# Altium PCB v1_long.PcbDoc (part 3 of 4)
Units mm, origin at the board's own origin, x right, y up, seen from the top; angles counter-clockwise.
Board outline 116.27 x 185.5 mm, 2 copper layers (Top Layer, Bottom Layer); 294 components, 195 nets, 982 pads, 413 vias.
Unrouted connection lines stored in the file: 3.
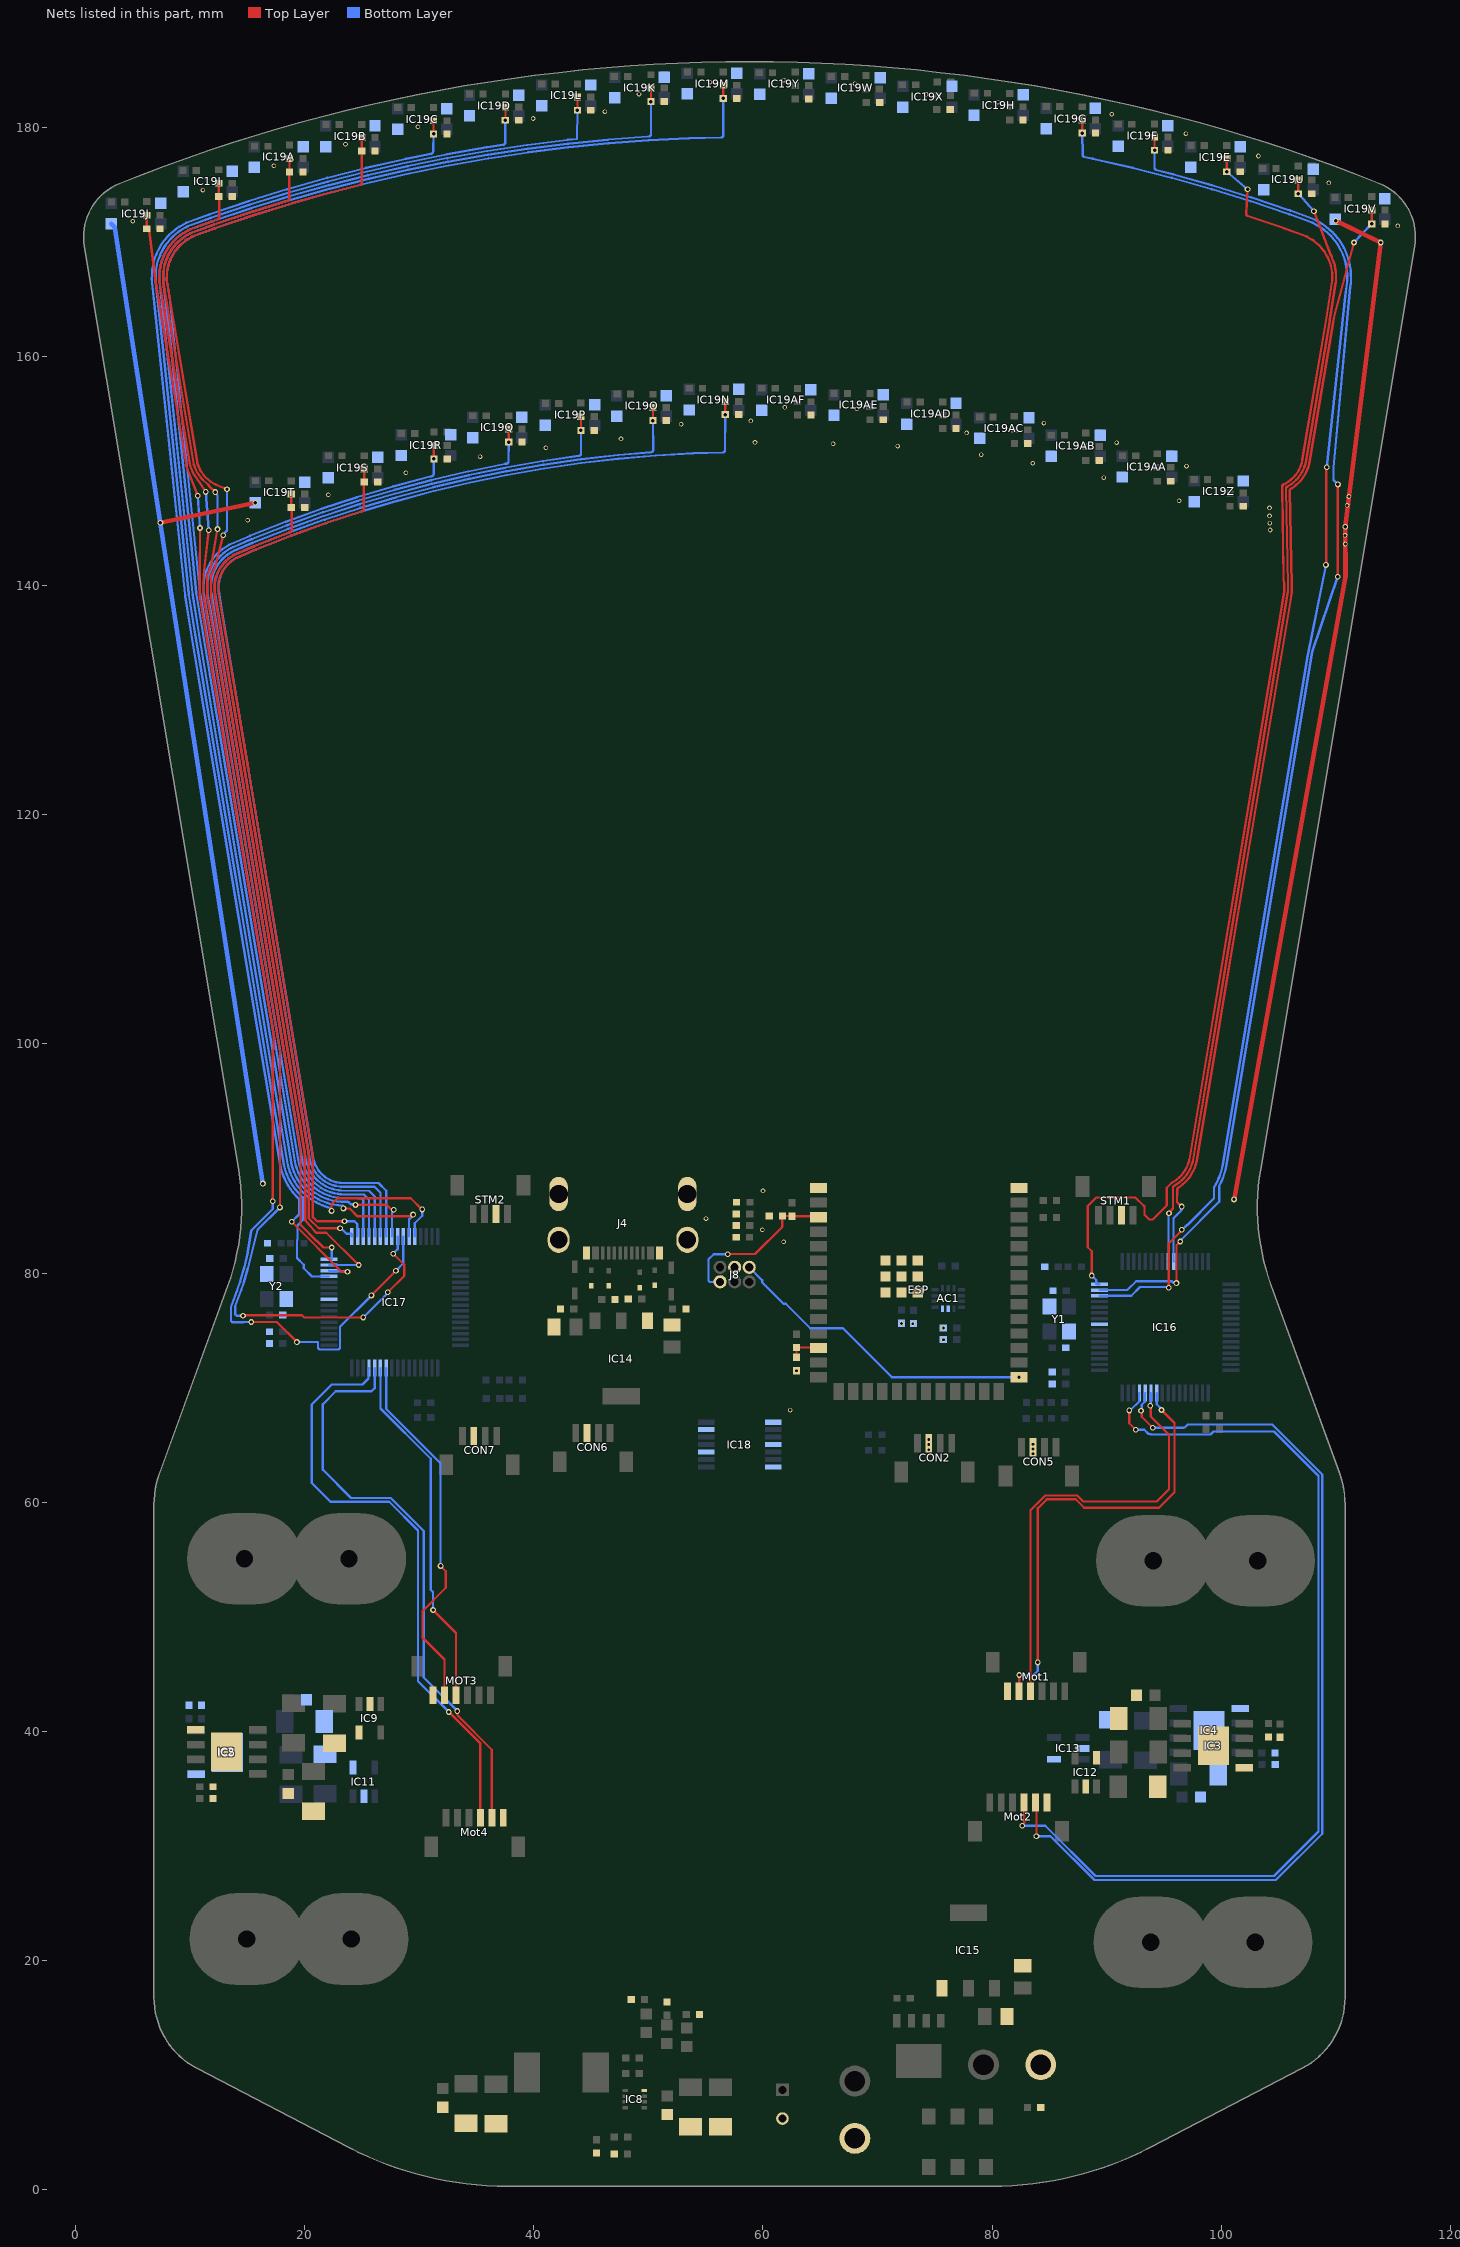
[diagram p3: the nets of this part, all layers, seen from the top]

## Via types
v1: diameter 0.5, hole 0.3, Top Layer to Bottom Layer, tented both sides, 349 vias
v2: diameter 0.4, hole 0.25, Top Layer to Bottom Layer, tented both sides, 63 vias
v3: diameter 0.7, hole 0.4, Top Layer to Bottom Layer, tented both sides, 1 vias

## Nets (pads, with @x,y where several pads share a name; then routed paths per layer and width w, separated by ;. In a path a pad name is that pad's centre, name@x,y a point inside that pad or via, vN(x,y) a via of type N, cw(c..) or ccw(c..) an arc to the next point about the centre after c; other vN are vias at no path point) (continued)
ADC1-11: C53G.1 IC16.14 R42G.1 | length 127.4
  Top Layer w0.2: v1(87.866,179.525) R42G.1@87.866,180.675 ; v1(95.437,78.709) 95.437,82.605 96.553,83.721 v1(96.553,83.772) ; v1(109.15,141.825) 109.188,141.863 109.188,150.312 v1(109.225,150.35)
  Bottom Layer w0.2: v1(87.866,179.525) 87.914,177.623 ccw(c88.114,177.628) 88.073,177.432 88.788,177.287 cw(c88.35,175.123) 88.844,177.275 92.253,176.495 cw(c91.762,174.342) 92.309,176.481 95.697,175.616 cw(c95.153,173.476) 95.754,175.601 99.121,174.651 cw(c98.521,172.526) 99.174,174.635 102.517,173.601 cw(c101.865,171.492) 102.571,173.584 105.886,172.467 cw(c105.181,170.375) 105.938,172.449 107.827,171.759 cw(c107.07,169.685) 108.174,171.597 108.623,171.338 cw(c107.521,169.425) 108.938,171.119 109.337,170.784 cw(c107.921,169.091) 109.608,170.515 109.944,170.117 cw(c108.257,168.692) 110.165,169.804 110.425,169.357 cw(c108.519,168.242) 110.591,169.007 110.771,168.52 cw(c108.7,167.754) 110.872,168.15 110.966,167.641 cw(c108.794,167.241) 111.002,167.259 111.006,166.739 cw(c108.798,166.72) 110.99,166.451 110.848,165.288 v1(109.225,150.35) ; IC16.14@89.387,78.012 92.149,78.012 92.923,78.786 95.279,78.786 95.356,78.709 v1(95.437,78.709) ; v1(96.553,83.772) 96.597,83.772 97.015,84.19 97.054,84.19 99.385,86.521 99.385,87.473 99.539,87.744 ccw(c95.913,89.803) 99.843,88.409 99.948,88.706 ccw(c96.018,90.1) 100.131,89.414 103.376,108.866 107.554,133.916 v1(109.15,141.825)
ADC1-12: C53F.1 IC16.15 R42F.1 | length 121.5
  Top Layer w0.2: v1(94.191,178.025) R42F.1@94.191,179.175 ; v1(96.1,79.125) 96.1,82.425 v1(96.425,82.75) ; v1(110.175,140.8) 110.187,140.812 110.187,148.837 v1(110.2,148.85)
  Bottom Layer w0.2: IC16.15@89.387,78.512 91.812,78.512 92.589,79.289 95.678,79.289 95.784,79.182 96.043,79.182 v1(96.1,79.125) ; v1(94.191,178.025) 94.176,176.505 ccw(c94.376,176.503) 94.326,176.309 95.789,175.93 cw(c95.153,173.476) 95.841,175.916 99.209,174.966 cw(c98.521,172.526) 99.271,174.947 102.612,173.914 cw(c101.865,171.492) 102.674,173.894 105.991,172.777 cw(c105.181,170.375) 106.052,172.755 107.939,172.067 cw(c107.07,169.685) 108.337,171.881 108.786,171.622 cw(c107.521,169.425) 109.147,171.37 109.547,171.035 cw(c107.921,169.091) 109.859,170.725 110.194,170.328 cw(c108.257,168.692) 110.447,169.969 110.709,169.519 cw(c108.519,168.242) 110.897,169.122 111.078,168.634 cw(c108.7,167.754) 111.194,168.208 111.287,167.702 cw(c108.794,167.241) 111.329,167.261 111.333,166.742 cw(c108.798,166.72) 111.315,166.412 111.229,165.709 109.803,150.297 109.803,149.247 v1(110.2,148.85) ; v1(96.425,82.75) 96.425,82.823 99.823,86.221 99.823,87.582 ccw(c95.913,89.803) 100.151,88.3 100.256,88.596 ccw(c96.018,90.1) 100.454,89.361 103.714,108.902 107.96,134.272 v1(110.175,140.8)
ADC1-13: C53E.1 IC16.16 R42E.1 | length 115.6
  Top Layer w0.2: v1(88.7,79.775) 88.7,81.9 88.35,82.25 88.35,85.85 89.1,86.6 92.504,86.6 93.241,85.863 93.3,85.804 93.3,85.105 93.359,85.046 93.73,84.675 94.02,84.675 95.25,85.905 95.25,87.445 95.68,87.875 95.933,88.022 ccw(c95.315,89.083) 96.108,88.146 96.349,88.35 ccw(c95.556,89.286) 96.5,88.503 96.702,88.746 ccw(c95.757,89.529) 96.824,88.923 96.98,89.197 ccw(c95.913,89.803) 97.069,89.393 97.175,89.69 ccw(c96.018,90.1) 97.228,89.898 99.288,102.219 105.285,138.169 105.501,139.492 ccw(c104.29,139.689) 105.517,139.692 105.516,140.024 ccw(c104.289,140.022) 105.499,140.227 105.444,140.554 105.332,148.669 cw(c105.532,148.671) 105.438,148.848 ccw(c105.016,149.642) 105.456,148.857 105.848,149.078 ccw(c105.407,149.862) 106.011,149.195 106.344,149.497 ccw(c105.74,150.163) 106.476,149.646 106.734,150.013 ccw(c105.997,150.53) 106.83,150.189 107,150.603 ccw(c106.167,150.945) 107.055,150.797 107.092,151.019 109.15,163.15 109.686,166.572 ccw(c108.798,166.72) 109.698,166.727 109.694,167.248 ccw(c108.794,167.241) 109.68,167.403 109.586,167.916 ccw(c108.7,167.754) 109.544,168.066 109.363,168.555 ccw(c108.519,168.242) 109.297,168.695 109.035,169.146 ccw(c108.257,168.692) 108.945,169.273 108.609,169.671 ccw(c107.921,169.091) 108.498,169.781 108.099,170.115 ccw(c107.521,169.425) 107.971,170.205 107.519,170.465 ccw(c107.07,169.685) 107.378,170.531 105.49,171.22 ccw(c105.181,170.375) 105.469,171.227 102.323,172.287 cw(c102.387,172.477) 102.187,172.488 v1(102.309,174.615) ; v1(100.491,176.15) R42E.1@100.491,177.3
  Bottom Layer w0.2: v1(88.7,79.775) 89.089,79.386 89.089,79.062 89.139,79.012 IC16.16@89.387,79.012 ; v1(100.491,176.15) v1(102.309,174.615)
ADC1-14: C53U.1 IC16.25 R42U.1 | length 97.7
  Top Layer w0.2: v1(95.45,85.214) 95.45,85.292 95.8,85.642 95.8,87.533 95.86,87.592 cw(c96.001,87.451) 95.903,87.625 96.125,87.75 96.228,87.824 ccw(c95.315,89.083) 96.319,87.896 96.561,88.101 ccw(c95.556,89.286) 96.752,88.294 96.954,88.537 ccw(c95.757,89.529) 97.108,88.761 97.263,89.034 ccw(c95.913,89.803) 97.377,89.283 97.483,89.58 ccw(c96.018,90.1) 97.551,89.844 99.611,102.165 101.281,112.178 105.608,138.115 ; 105.608,138.117 105.653,138.391 105.823,139.439 ccw(c104.29,139.689) 105.844,139.691 105.843,140.022 ccw(c104.289,140.022) 105.843,140.058 105.662,148.477 cw(c105.862,148.481) 105.764,148.655 106.008,148.793 ccw(c105.407,149.862) 106.23,148.952 106.564,149.254 ; 106.564,149.254 ccw(c105.74,150.163) 106.744,149.458 107.002,149.825 ccw(c105.997,150.53) 107.133,150.065 ; v1(106.741,174.225) R42U.1@106.741,175.425 ; 107.133,150.065 107.303,150.481 ccw(c106.167,150.945) 107.377,150.74 109.472,163.095 ccw(c109.15,163.15) 109.473,163.099 109.491,163.211 110.01,166.529 ccw(c108.798,166.72) 110.025,166.731 110.021,167.25 ccw(c108.794,167.241) 110.001,167.463 109.911,167.953 cw(c110.108,167.99) 109.908,167.99 109.908,168.041 ccw(c109.708,168.041) 109.878,168.147 109.852,168.188 cw(c110.022,168.293) 109.835,168.223 109.683,168.632 cw(c109.871,168.701) 109.671,168.701 109.671,168.759 109.615,168.814 cw(c109.757,168.956) 109.57,168.884 v1(108.1,172.7)
  Bottom Layer w0.2: IC16.25@95.375,81 95.412,81.037 95.412,85.177 v1(95.45,85.214) ; v1(106.741,174.225) v1(108.1,172.7)
ADC1-15: C53V.1 IC16.26 R42V.1 | length 95.2
  Top Layer w0.2: v1(96.55,85.8) 96.547,85.8 96.152,86.195 ccw(c95.825,86.197) 96.152,86.197 96.156,87.277 cw(c96.356,87.275) 96.258,87.45 96.285,87.465 ccw(c96.125,87.75) 96.317,87.485 96.42,87.56 ccw(c95.315,89.083) 96.531,87.647 96.649,87.747 96.772,87.851 ccw(c95.556,89.286) 97.004,88.086 97.204,88.327 ccw(c95.757,89.529) 97.393,88.6 97.547,88.872 ccw(c95.913,89.803) 97.685,89.174 97.791,89.471 ccw(c96.018,90.1) 97.874,89.79 99.933,102.111 101.611,112.165 106.05,138.65 106.155,139.443 ccw(c104.29,139.689) 106.171,139.692 106.17,140.025 ccw(c104.289,140.022) 106.17,140.064 105.993,148.288 cw(c106.193,148.292) 106.095,148.466 106.169,148.508 ccw(c105.407,149.862) 106.45,148.71 106.782,149.011 ccw(c105.74,150.163) 107.011,149.27 107.269,149.638 ccw(c105.997,150.53) 107.435,149.941 107.605,150.357 ccw(c106.167,150.945) 107.699,150.686 109.795,163.041 ccw(c109.15,163.15) 109.796,163.049 109.859,163.452 v1(111.6,169.975) ; v1(113.141,171.6) R42V.1@113.141,172.8
  Bottom Layer w0.2: IC16.26@95.875,81 95.845,81.03 95.845,84.789 96.514,85.458 96.514,85.764 v1(96.55,85.8) ; v1(111.6,169.975) v1(113.141,171.6)
ADC2-0: C53T.1 IC17.17 R42T.1 | length 72.4
  Top Layer w0.2: R42T.1@18.816,148 C53T.1@18.816,146.85 18.85,146.65 18.85,144.88 cw(c18.65,144.88) 18.718,144.692 18.674,144.676 ccw(c19.09,143.522) 18.64,144.664 15.618,143.472 ccw(c16.067,142.331) 15.584,143.459 13.938,142.754 ccw(c14.421,141.626) 13.758,142.659 13.476,142.478 ccw(c14.14,141.446) 13.315,142.354 13.062,142.125 13.056,142.119 ccw(c13.893,141.222) 12.951,142.008 12.94,141.995 12.929,141.981 12.652,141.63 12.409,141.182 12.133,140.53 12.133,139.18 12.136,139.164 14.751,123.897 16.023,116.27 18.831,99.434 20.346,90.351 cw(c20.149,90.318) 20.348,90.338 20.348,90.336 20.35,90.309 20.35,84.763 21.213,83.9 v1(23.075,83.9)
  Bottom Layer w0.2: v1(23.075,83.9) 23.156,83.9 23.631,83.425 24.05,83.425 24.1,83.375 IC17.17@24.1,83.188
ADC2-1: C53S.1 IC17.18 R42S.1 | length 79.5
  Top Layer w0.2: v1(23.459,84.521) 21.054,84.521 20.7,84.875 20.7,90.2 20.677,90.352 ccw(c20.48,90.322) 20.677,90.355 15.073,123.951 15.056,124.055 12.463,139.299 12.46,139.316 12.46,140.395 12.684,140.986 cw(c13.526,140.667) 12.736,141.099 12.897,141.391 cw(c13.686,140.959) 12.979,141.516 13.185,141.777 cw(c13.893,141.222) 13.288,141.888 13.534,142.111 cw(c14.14,141.446) 13.654,142.204 13.933,142.383 cw(c14.421,141.626) 14.068,142.454 15.713,143.158 cw(c16.067,142.331) 15.737,143.168 18.76,144.359 cw(c19.09,143.522) 18.784,144.368 21.84,145.472 cw(c22.146,144.625) 21.865,145.48 24.951,146.495 cw(c25.232,145.64) 24.976,146.503 25.008,146.512 ccw(c24.951,146.704) 25.151,146.704 25.151,148.85 C53S.1@25.191,149.05 R42S.1@25.191,150.2
  Bottom Layer w0.2: v1(23.459,84.521) 24.329,84.521 24.575,84.275 24.575,83.213 IC17.18@24.6,83.188
ADC2-2: C53R.1 IC17.19 R42R.1 | length 87.3
  Top Layer w0.2: v1(31.266,151.075) R42R.1@31.266,152.25
  Bottom Layer w0.2: 19.551,89.361 19.656,89.067 ccw(c21.737,89.803) 19.818,88.712 19.974,88.437 ccw(c21.893,89.529) 20.192,88.121 20.396,87.875 ccw(c22.094,89.286) 20.666,87.603 20.908,87.397 ccw(c22.335,89.083) 21.224,87.174 21.497,87.015 ccw(c22.607,88.924) 21.846,86.851 22.143,86.743 ccw(c22.903,88.815) 22.515,86.642 22.827,86.587 ccw(c23.214,88.76) 22.942,86.569 ccw(c23.214,88.76) 23.169,86.553 24.65,86.523 24.67,86.504 24.95,86.504 25.1,86.354 IC17.19@25.1,83.188 ; 19.551,89.361 cw(c21.632,90.1) 19.454,89.735 16.595,106.878 11.453,137.701 11.23,139.042 11.182,139.329 cw(c13.36,139.689) 11.152,139.691 11.153,140.027 cw(c13.361,140.022) 11.184,140.39 11.24,140.722 cw(c13.417,140.351) 11.331,141.075 11.392,141.253 11.44,141.391 cw(c13.526,140.667) 11.589,141.726 11.749,142.018 cw(c13.686,140.959) 11.952,142.326 12.158,142.588 cw(c13.893,141.222) 12.408,142.856 12.655,143.08 cw(c14.14,141.446) 12.948,143.305 13.226,143.483 cw(c14.421,141.626) 13.552,143.656 15.199,144.361 cw(c16.067,142.331) 15.258,144.385 18.278,145.575 cw(c19.09,143.522) 18.34,145.599 21.393,146.701 cw(c22.146,144.625) 21.456,146.723 24.54,147.737 cw(c25.232,145.64) 24.603,147.757 27.717,148.682 cw(c28.346,146.565) 27.779,148.699 30.919,149.534 cw(c31.486,147.4) 30.98,149.549 31.09,149.575 ccw(c31.044,149.77) 31.244,149.766 v1(31.266,151.075)
ADC2-3: C53Q.1 IC17.20 R42Q.1 | length 94
  Top Layer w0.2: R42Q.1@37.791,153.7 37.8,153.691 v1(37.8,152.55)
  Bottom Layer w0.2: 21.504,146.394 18.453,145.292 ccw(c19.09,143.522) 18.397,145.271 15.379,144.081 ccw(c16.067,142.331) 15.325,144.059 13.681,143.356 ccw(c14.421,141.626) 13.402,143.208 13.125,143.03 ccw(c14.14,141.446) 12.875,142.838 12.628,142.614 ccw(c13.893,141.222) 12.415,142.386 12.209,142.124 ccw(c13.686,140.959) 12.035,141.861 11.877,141.571 ccw(c13.526,140.667) 11.749,141.283 11.64,140.968 ccw(c13.417,140.351) 11.562,140.667 11.506,140.336 ccw(c13.361,140.022) 11.48,140.026 11.479,139.692 11.479,139.689 ccw(c13.36,139.689) 11.505,139.382 11.552,139.096 11.776,137.755 19.777,89.789 ccw(c21.632,90.1) 19.859,89.471 19.964,89.176 19.965,89.173 ccw(c21.737,89.803) 20.102,88.873 20.258,88.598 ccw(c21.893,89.529) 20.444,88.33 20.647,88.085 ccw(c22.094,89.286) 20.877,87.852 21.12,87.646 ccw(c22.335,89.083) 21.389,87.457 21.662,87.298 ccw(c22.607,88.924) 21.958,87.158 22.255,87.05 ccw(c22.903,88.815) 22.572,86.964 22.884,86.908 ; 21.504,146.394 cw(c22.146,144.625) 21.558,146.412 21.56,146.413 24.642,147.426 ; 22.885,86.908 ccw(c23.214,88.76) 23.176,86.88 25.174,86.84 25.6,86.414 IC17.20@25.6,83.188 ; 24.642,147.426 cw(c25.232,145.64) 24.698,147.444 27.809,148.368 cw(c28.346,146.565) 27.863,148.383 31.001,149.217 cw(c31.486,147.4) 31.057,149.231 34.216,149.975 cw(c34.648,148.144) 34.271,149.987 37.45,150.638 cw(c37.831,148.796) 37.509,150.649 37.619,150.668 ccw(c37.585,150.866) 37.785,150.863 v1(37.8,152.55)
ADC2-4: C53P.1 IC17.21 R42P.1 | length 100.5
  Top Layer w0.2: R42P.1@44.091,154.775 44.107,154.759 v1(44.107,153.575)
  Bottom Layer w0.2: 22.366,87.357 22.072,87.465 cw(c22.607,88.924) 21.826,87.58 21.552,87.74 cw(c22.335,89.083) 21.331,87.896 21.091,88.1 cw(c22.094,89.286) 20.899,88.293 20.696,88.537 cw(c21.893,89.529) 20.542,88.762 20.386,89.035 cw(c21.737,89.803) 20.272,89.286 20.167,89.581 cw(c21.632,90.1) 20.099,89.843 12.099,137.809 11.912,138.927 11.827,139.435 cw(c13.36,139.689) 11.806,139.689 11.806,139.692 11.807,140.025 cw(c13.361,140.022) 11.829,140.282 11.885,140.612 cw(c13.417,140.351) 11.948,140.861 12.058,141.176 cw(c13.526,140.667) 12.162,141.412 12.322,141.704 cw(c13.686,140.959) 12.465,141.921 12.672,142.183 cw(c13.893,141.222) 12.848,142.372 13.095,142.596 cw(c14.14,141.446) 13.3,142.754 13.58,142.933 cw(c14.421,141.626) 13.81,143.056 15.454,143.759 cw(c16.067,142.331) 15.498,143.777 18.517,144.967 cw(c19.09,143.522) 18.563,144.984 21.618,146.087 cw(c22.146,144.625) 21.66,146.102 24.744,147.116 cw(c25.232,145.64) 24.79,147.13 27.903,148.054 cw(c28.346,146.565) 27.947,148.067 31.085,148.901 cw(c31.486,147.4) 31.132,148.913 34.29,149.656 cw(c34.648,148.144) 34.336,149.666 37.517,150.318 cw(c37.831,148.796) 37.564,150.327 40.763,150.887 cw(c41.031,149.356) 40.811,150.894 43.946,151.35 ccw(c43.918,151.548) 44.118,151.549 v1(44.107,153.575) ; 22.367,87.357 ccw(c22.903,88.815) 22.631,87.285 22.941,87.23 ccw(c23.214,88.76) 23.183,87.207 25.625,87.158 26.1,86.683 IC17.21@26.1,83.188
ADC2-5: C53O.1 IC17.22 R42O.1 | length 107.1
  Top Layer w0.2: v1(50.391,154.425) R42O.1@50.391,155.575
  Bottom Layer w0.2: IC17.22@26.6,83.188 26.6,87.008 26.075,87.533 23.214,87.533 cw(c23.214,88.76) 22.999,87.552 22.69,87.607 cw(c22.903,88.815) 22.48,87.664 22.185,87.772 cw(c22.607,88.924) 21.99,87.863 21.718,88.022 cw(c22.335,89.083) 21.543,88.146 21.302,88.349 cw(c22.094,89.286) 21.15,88.502 20.948,88.747 cw(c21.893,89.529) 20.827,88.922 20.67,89.197 cw(c21.737,89.803) 20.58,89.394 20.476,89.69 cw(c21.632,90.1) 20.421,89.9 12.421,137.863 12.15,139.489 cw(c13.36,139.689) 12.133,139.69 12.134,140.024 cw(c13.361,140.022) 12.151,140.227 12.207,140.557 cw(c13.417,140.351) 12.257,140.754 12.367,141.069 cw(c13.526,140.667) 12.45,141.256 12.609,141.547 cw(c13.686,140.959) 12.722,141.718 12.929,141.981 cw(c13.893,141.222) 13.068,142.13 13.314,142.354 cw(c14.14,141.446) 13.477,142.479 13.758,142.659 cw(c14.421,141.626) 13.938,142.754 15.584,143.459 cw(c16.067,142.331) 15.618,143.472 18.64,144.664 cw(c19.09,143.522) 18.673,144.676 21.729,145.779 cw(c22.146,144.625) 21.762,145.791 24.849,146.806 cw(c25.232,145.64) 24.882,146.816 27.995,147.741 cw(c28.346,146.565) 28.031,147.751 31.17,148.585 cw(c31.486,147.4) 31.206,148.595 34.366,149.338 cw(c34.648,148.144) 34.402,149.346 37.583,149.998 cw(c37.831,148.796) 37.62,150.005 40.819,150.565 cw(c41.031,149.356) 40.855,150.57 44.07,151.038 cw(c44.246,149.824) 44.105,151.042 47.332,151.417 cw(c47.473,150.198) 47.368,151.42 50.227,151.669 ccw(c50.21,151.868) 50.41,151.869 v1(50.391,154.425)
ADC2-6: C53N.1 IC17.23 R42N.1 | length 113.7
  Top Layer w0.2: v1(56.707,154.95) R42N.1@56.707,156.1
  Bottom Layer w0.2: 22.592,87.971 22.297,88.079 cw(c22.607,88.924) 22.154,88.146 21.882,88.305 cw(c22.335,89.083) 21.754,88.395 21.513,88.599 cw(c22.094,89.286) 21.402,88.711 21.199,88.956 cw(c21.893,89.529) 21.11,89.084 20.954,89.359 cw(c21.737,89.803) 20.889,89.502 20.889,89.503 20.784,89.799 cw(c21.632,90.1) 20.744,89.951 20.744,89.953 12.715,138.09 12.473,139.541 cw(c13.36,139.689) 12.46,139.691 12.461,140.023 cw(c13.361,140.022) 12.474,140.173 12.529,140.502 cw(c13.417,140.351) 12.566,140.646 12.676,140.962 cw(c13.526,140.667) 12.736,141.099 12.897,141.391 cw(c13.686,140.959) 12.979,141.516 13.186,141.779 cw(c13.893,141.222) 13.289,141.889 13.534,142.111 cw(c14.14,141.446) 13.654,142.203 13.933,142.383 cw(c14.421,141.626) 14.068,142.454 15.712,143.158 cw(c16.067,142.331) 15.737,143.168 18.76,144.359 cw(c19.09,143.522) 18.784,144.368 21.84,145.472 cw(c22.146,144.625) 21.865,145.48 24.951,146.495 cw(c25.232,145.64) 24.976,146.503 28.09,147.428 cw(c28.346,146.565) 28.115,147.435 31.254,148.27 cw(c31.486,147.4) 31.28,148.276 34.442,149.02 cw(c34.648,148.144) 34.468,149.025 37.651,149.678 cw(c37.831,148.796) 37.676,149.683 40.876,150.243 cw(c41.031,149.356) 40.902,150.247 44.117,150.714 cw(c44.246,149.824) 44.142,150.718 47.37,151.092 cw(c47.473,150.198) 47.395,151.095 50.632,151.376 cw(c50.71,150.479) 50.658,151.378 53.901,151.565 cw(c53.953,150.667) 53.927,151.566 56.495,151.64 ccw(c56.49,151.84) 56.69,151.839 v1(56.707,154.95) ; 22.593,87.971 ccw(c22.903,88.815) 22.746,87.929 ; 22.747,87.929 23.056,87.874 ; 23.057,87.874 ccw(c23.214,88.76) 23.213,87.86 26.425,87.86 27.1,87.185 IC17.23@27.1,83.188
ADC2-7: C53M.1 IC17.24 R42M.1 | length 147.4
  Top Layer w0.2: v1(24.424,85.945) 24.427,85.947 27.153,85.947 27.55,85.55 27.725,85.55 v1(27.75,85.525) ; v1(56.541,182.55) R42M.1@56.541,183.7
  Bottom Layer w0.2: v1(24.424,85.945) 24.367,86.002 24.01,86.002 23.856,86.156 ccw(c23.715,86.015) 23.719,86.215 23.162,86.226 cw(c23.214,88.76) 22.77,86.264 22.457,86.32 cw(c22.903,88.815) 22.03,86.436 21.732,86.545 cw(c22.607,88.924) 21.333,86.732 21.059,86.892 cw(c22.335,89.083) 20.698,87.147 20.454,87.353 cw(c22.094,89.286) 20.144,87.666 19.94,87.913 cw(c21.893,89.529) 19.69,88.275 19.533,88.55 cw(c21.737,89.803) 19.349,88.954 19.243,89.252 cw(c21.632,90.1) 19.132,89.681 15.267,112.849 10.859,139.275 cw(c13.36,139.689) 10.839,139.429 8.178,165.288 7.964,166.573 cw(c8.852,166.72) 7.952,166.726 7.956,167.249 cw(c8.856,167.241) 7.971,167.405 8.065,167.917 cw(c8.95,167.754) 8.106,168.066 8.287,168.555 cw(c9.131,168.242) 8.353,168.695 8.616,169.146 cw(c9.393,168.692) 8.706,169.274 9.042,169.672 cw(c9.729,169.091) 9.152,169.781 9.552,170.115 cw(c10.129,169.425) 9.681,170.205 10.129,170.464 cw(c10.58,169.685) 10.272,170.531 12.161,171.22 cw(c12.469,170.375) 12.182,171.227 15.498,172.345 cw(c15.786,171.492) 15.52,172.352 18.863,173.386 cw(c19.129,172.526) 18.885,173.392 22.253,174.342 cw(c22.497,173.476) 22.275,174.348 25.666,175.214 cw(c25.888,174.342) 25.687,175.219 29.099,176 cw(c29.3,175.123) 29.121,176.005 32.551,176.7 cw(c32.73,175.818) 32.573,176.704 36.019,177.313 cw(c36.176,176.427) 36.042,177.317 39.502,177.84 cw(c39.637,176.95) 39.524,177.843 42.997,178.279 cw(c43.109,177.386) 43.019,178.282 46.501,178.631 cw(c46.591,177.736) 46.524,178.633 50.014,178.895 cw(c50.081,177.998) 50.036,178.897 53.532,179.072 cw(c53.577,178.173) 53.554,179.073 56.337,179.142 ccw(c56.332,179.342) 56.532,179.341 ; IC17.24@27.6,83.188 27.6,85.294 27.75,85.444 v1(27.75,85.525) ; 56.532,179.342 v1(56.541,182.55)
ADC2-8: C53K.1 IC17.27 R42K.1 | length 143.4
  Top Layer w0.2: v1(23.371,85.642) 23.385,85.628 23.921,85.628 24.604,84.945 29.214,84.945 29.369,85.1 v1(29.45,85.1) ; v1(50.216,182.275) R42K.1@50.216,183.45
  Bottom Layer w0.2: 10.404,170.927 10.161,170.838 ccw(c10.58,169.685) 9.966,170.748 9.517,170.489 ccw(c10.129,169.425) 9.341,170.365 8.942,170.031 ccw(c9.729,169.091) 8.792,169.882 8.457,169.485 ccw(c9.393,168.692) 8.333,169.311 8.071,168.86 ccw(c9.131,168.242) 7.98,168.668 7.799,168.179 ccw(c8.95,167.754) 7.743,167.976 7.649,167.463 ccw(c8.856,167.241) 7.629,167.252 7.625,166.728 ccw(c8.852,166.72) 7.635,166.559 8.285,161.058 10.514,139.395 ccw(c13.36,139.689) 10.537,139.222 12.778,125.784 18.809,89.627 ccw(c21.632,90.1) 18.935,89.143 19.041,88.844 ccw(c21.737,89.803) 19.249,88.389 19.405,88.114 ccw(c21.893,89.529) 19.688,87.704 19.893,87.457 ccw(c22.094,89.286) 20.243,87.104 20.487,86.897 ccw(c22.335,89.083) 20.895,86.609 21.17,86.449 ccw(c22.607,88.924) 21.62,86.238 21.918,86.128 ccw(c22.903,88.815) 22.4,85.998 22.713,85.942 ccw(c23.214,88.76) 23.155,85.899 23.297,85.896 23.297,85.886 23.314,85.869 23.314,85.699 v1(23.371,85.642) ; 10.405,170.928 12.047,171.527 cw(c12.469,170.375) 12.077,171.537 15.394,172.655 cw(c15.786,171.492) 15.423,172.664 18.766,173.698 cw(c19.129,172.526) 18.796,173.707 22.164,174.657 cw(c22.497,173.476) 22.195,174.665 25.585,175.531 cw(c25.888,174.342) 25.615,175.538 29.026,176.319 cw(c29.3,175.123) 29.057,176.326 29.896,176.495 32.486,177.021 cw(c32.73,175.818) 32.517,177.026 35.962,177.635 cw(c36.176,176.427) 35.993,177.64 39.453,178.163 cw(c39.637,176.95) 39.484,178.168 42.954,178.604 cw(c43.109,177.386) 42.987,178.607 46.469,178.957 cw(c46.591,177.736) 46.499,178.959 49.989,179.222 cw(c50.081,177.998) 50.021,179.223 50.027,179.224 ccw(c50.018,179.424) 50.218,179.424 ; IC17.27@29.1,83.188 29.1,84.672 29.45,85.022 v1(29.45,85.1) ; v1(50.216,182.275) 50.218,179.424
ADC2-9: C53L.1 IC17.28 R42L.1 | length 139.7
  Top Layer w0.2: v1(22.33,85.421) 22.33,86.005 22.85,86.525 29.25,86.525 30.225,85.55 v1(30.25,85.55) ; v1(43.8,181.525) R42L.1@43.8,182.675
  Bottom Layer w0.2: 11.935,171.834 10.495,171.308 10.292,171.234 10.051,171.146 ccw(c10.58,169.685) 9.804,171.031 9.352,170.771 ccw(c10.129,169.425) 9.131,170.616 8.732,170.283 ccw(c9.729,169.091) 8.542,170.093 8.207,169.696 ccw(c9.393,168.692) 8.05,169.474 7.788,169.025 ccw(c9.131,168.242) 7.673,168.781 7.493,168.294 ccw(c8.95,167.754) 7.421,168.034 7.328,167.522 ccw(c8.856,167.241) 7.302,167.254 7.298,166.731 ccw(c8.852,166.72) 7.308,166.538 7.558,164.423 10.189,139.356 ccw(c13.36,139.689) 10.214,139.167 10.75,135.775 14.875,111.1 18.487,89.574 ccw(c21.632,90.1) 18.626,89.033 18.732,88.735 ccw(c21.737,89.803) 18.965,88.227 19.121,87.952 ccw(c21.893,89.529) 19.436,87.495 19.642,87.248 ccw(c22.094,89.286) 20.031,86.854 20.275,86.648 ccw(c22.335,89.083) 20.73,86.327 21.005,86.167 ; 11.935,171.834 cw(c12.469,170.375) 11.973,171.847 15.289,172.965 cw(c15.786,171.492) 15.326,172.977 18.67,174.011 cw(c19.129,172.526) 18.707,174.022 22.075,174.972 cw(c22.497,173.476) 22.113,174.982 25.504,175.848 cw(c25.888,174.342) 25.542,175.857 28.952,176.637 cw(c29.3,175.123) 28.991,176.646 32.421,177.341 cw(c32.73,175.818) 32.459,177.348 35.906,177.957 cw(c36.176,176.427) 35.944,177.964 39.404,178.487 cw(c39.637,176.95) 39.444,178.492 42.914,178.928 cw(c43.109,177.386) 42.954,178.933 43.766,179.014 v1(43.8,181.525) ; 21.005,86.167 ccw(c22.607,88.924) 21.498,85.934 ; 21.499,85.934 cw(c21.428,85.747) 21.514,85.927 ccw(c22.906,88.822) 22.234,85.681 22.275,85.64 22.333,85.581 22.333,85.499 22.333,85.494 v1(22.33,85.421) ; IC17.28@29.6,83.188 29.6,84.35 30.25,85 v1(30.25,85.55)
ADC2-10: C53D.1 IC17.13 R42D.1 | length 128.3
  Top Layer w0.2: v1(37.507,180.65) 37.516,180.659 R42D.1@37.516,181.8
  Bottom Layer w0.2: IC17.13@22.112,79.7 20.625,79.7 19.9,80.425 19.9,80.725 19.32,81.305 19.32,82.865 19.35,82.895 19.35,84.15 19.82,84.62 19.82,86.605 cw(c22.094,89.286) 19.389,87.04 19.185,87.287 cw(c21.893,89.529) 18.837,87.79 18.68,88.066 cw(c21.737,89.803) 18.424,88.626 18.318,88.924 cw(c21.632,90.1) 18.165,89.515 14.553,111.046 13.749,115.85 10.427,135.722 cw(c10.75,135.775) 10.427,135.723 9.888,139.14 cw(c13.36,139.689) 9.864,139.322 7.598,160.909 6.983,166.502 cw(c8.852,166.72) 6.971,166.735 6.975,167.257 cw(c8.856,167.241) 7.006,167.581 7.1,168.094 cw(c8.95,167.754) 7.186,168.406 7.367,168.896 cw(c9.131,168.242) 7.506,169.19 7.768,169.639 cw(c9.393,168.692) 7.957,169.907 8.292,170.304 cw(c9.729,169.091) 8.523,170.534 8.922,170.868 cw(c10.129,169.425) 9.189,171.054 9.64,171.315 cw(c10.58,169.685) 9.935,171.452 10.18,171.542 cw(c10.292,171.234) 10.181,171.542 11.822,172.141 cw(c12.469,170.375) 11.868,172.157 15.183,173.274 cw(c15.786,171.492) 15.23,173.289 18.573,174.323 cw(c19.129,172.526) 18.618,174.336 21.987,175.287 cw(c22.497,173.476) 22.032,175.299 25.423,176.165 cw(c25.888,174.342) 25.469,176.176 28.879,176.956 cw(c29.3,175.123) 28.927,176.967 32.356,177.661 cw(c32.73,175.818) 32.403,177.67 35.849,178.28 cw(c36.176,176.427) 35.895,178.287 37.326,178.503 ccw(c37.296,178.701) 37.497,178.7 v1(37.507,180.65)
ADC2-11: C53C.1 IC17.14 R42C.1 | length 123.5
  Top Layer w0.2: v1(18.848,84.473) 23.2,80.12 v1(23.725,80.12) ; v1(31.241,179.45) R42C.1@31.241,180.6
  Bottom Layer w0.2: 10.069,171.849 9.83,171.762 ccw(c10.58,169.685) 9.477,171.598 9.027,171.338 ccw(c10.129,169.425) 8.712,171.118 8.314,170.786 ccw(c9.729,169.091) 8.042,170.515 7.706,170.117 ccw(c9.393,168.692) 7.485,169.804 7.223,169.354 ccw(c9.131,168.242) 7.057,169.002 6.879,168.519 ccw(c8.95,167.754) 6.778,168.153 6.684,167.638 ccw(c8.856,167.241) 6.648,167.261 6.644,166.737 ccw(c8.852,166.72) 6.657,166.479 6.9,164.264 9.539,139.285 ccw(c13.36,139.689) 9.565,139.089 10.104,135.672 ccw(c10.427,135.723) 10.105,135.668 ; 10.069,171.849 11.71,172.448 cw(c12.469,170.375) 11.765,172.467 15.078,173.584 cw(c15.786,171.492) 15.133,173.601 18.475,174.635 cw(c19.129,172.526) 18.531,174.651 19.93,175.046 21.897,175.601 cw(c22.497,173.476) 21.951,175.616 25.342,176.481 cw(c25.888,174.342) 25.397,176.495 28.806,177.275 cw(c29.3,175.123) 28.861,177.287 31.037,177.728 ccw(c30.998,177.924) 31.197,177.918 v1(31.241,179.45) ; 10.105,135.668 11.132,129.522 14.23,110.992 15.236,104.993 17.842,89.46 ccw(c21.632,90.1) 18.01,88.816 18.116,88.516 ccw(c21.737,89.803) 18.396,87.905 18.553,87.629 ccw(c21.893,89.529) 18.917,87.098 ccw(c21.893,89.529) 18.933,87.078 19.138,86.831 ccw(c22.094,89.286) 19.493,86.457 19.493,85.118 v1(18.848,84.473) ; IC17.14@22.112,80.2 22.152,80.16 23.685,80.16 v1(23.725,80.12)
ADC2-12: C53B.1 IC17.15 R42B.1 | length 117.7
  Top Layer w0.2: 7.956,167.248 7.952,166.727 ccw(c8.852,166.72) 7.964,166.572 8.007,166.315 10.595,150.797 ccw(c11.483,150.945) 10.65,150.605 10.82,150.189 ccw(c11.653,150.53) 10.916,150.013 11.173,149.648 ccw(c11.911,150.163) 11.307,149.496 11.64,149.194 ccw(c12.243,149.862) 11.802,149.078 12.192,148.859 12.194,148.857 ccw(c12.634,149.642) 12.284,148.813 v1(13.2,148.425) ; 7.956,167.249 cw(c8.856,167.241) 7.971,167.405 8.065,167.917 cw(c8.95,167.754) 8.106,168.066 8.287,168.555 cw(c9.131,168.242) 8.353,168.695 8.616,169.146 cw(c9.393,168.692) 8.705,169.273 9.042,169.672 cw(c9.729,169.091) 9.152,169.781 9.552,170.115 cw(c10.129,169.425) 9.681,170.205 10.129,170.464 cw(c10.58,169.685) 10.272,170.531 12.161,171.22 cw(c12.469,170.375) 12.182,171.227 15.498,172.345 cw(c15.786,171.492) 15.521,172.352 18.863,173.386 cw(c19.129,172.526) 18.885,173.392 22.253,174.342 cw(c22.497,173.476) 22.275,174.348 24.814,174.997 ccw(c24.765,175.191) 24.965,175.191 24.965,177.775 C53B.1@24.966,177.975 R42B.1@24.966,179.125 ; v1(12.878,144.421) 12.153,141.615 11.81,140.835 ccw(c12.133,140.786) 11.806,140.786 11.806,139.18 11.807,139.072 ccw(c12.007,139.073) 11.807,139.068 11.807,139.052 11.809,139.028 14.445,123.741 18.508,99.38 19.992,90.482 cw(c19.795,90.449) 19.995,90.449 20.023,84.627 20.866,83.642 20.983,83.525 21.875,83.525 v1(24.7,80.7)
  Bottom Layer w0.2: v1(12.878,144.421) 12.878,144.502 13.2,144.824 v1(13.2,148.425) ; IC17.15@22.112,80.7 v1(24.7,80.7)
ADC2-13: C53A.1 IC17.16 R42A.1 | length 106.8
  Top Layer w0.2: 10.272,150.745 7.899,164.975 7.641,166.518 cw(c8.852,166.72) 7.625,166.73 7.629,167.25 cw(c8.856,167.241) 7.649,167.463 7.649,167.465 7.743,167.974 cw(c8.95,167.754) 7.799,168.179 7.98,168.668 cw(c9.131,168.242) 8.071,168.86 8.333,169.311 cw(c9.393,168.692) 8.455,169.484 8.792,169.882 cw(c9.729,169.091) 8.942,170.031 9.341,170.365 cw(c10.129,169.425) 9.517,170.489 9.965,170.747 cw(c10.58,169.685) 10.161,170.838 10.163,170.839 10.404,170.927 ; 10.273,150.744 ccw(c11.483,150.945) 10.348,150.48 10.502,150.102 10.542,150.005 10.588,149.911 10.917,149.443 10.928,149.428 ccw(c11.911,150.163) 11.05,149.289 ccw(c11.911,150.163) 11.075,149.265 11.08,149.26 ; 10.405,170.928 12.047,171.527 cw(c12.469,170.375) 12.077,171.537 15.393,172.655 cw(c15.786,171.492) 15.423,172.664 18.499,173.616 ccw(c18.441,173.807) 18.641,173.807 18.641,175.925 C53A.1@18.666,176.125 R42A.1@18.666,177.3 ; 11.481,139.025 11.484,139.001 ccw(c11.809,139.028) 11.487,138.973 11.673,137.892 13.001,130.192 18.16,99.485 18.243,98.986 19.622,90.714 19.625,90.698 19.625,84.2 19.684,84.141 21.021,82.804 21.052,82.804 21.631,82.225 v1(22.35,82.225) ; 11.481,139.025 cw(c12.007,139.069) 11.48,139.056 11.48,139.061 cw(c12.007,139.073) 11.48,139.067 11.48,139.07 11.479,139.18 11.479,140.786 cw(c12.133,140.786) 11.529,141.037 11.826,141.75 11.825,141.807 cw(c12.025,141.807) 11.826,141.826 cw(c12.025,141.81) 11.828,141.843 v1(12.375,144.95) ; v1(12.174,148.183) 11.685,148.673 11.584,148.803 11.571,148.815 11.081,149.259 ; 11.08,149.26 11.081,149.259
  Bottom Layer w0.2: v1(12.174,148.183) 12.174,148.102 12.375,147.902 v1(12.375,144.95) ; IC17.16@22.112,81.2 22.3,81.2 22.35,81.25 v1(22.35,82.225)
ADC2-14: C53I.1 IC17.25 R42I.1 | length 124.3
  Top Layer w0.2: v1(11.342,148.196) 10.994,148.763 10.993,148.765 10.59,149.335 10.319,149.718 10.261,149.808 10.021,150.415 10.002,150.475 10.001,150.477 cw(c11.483,150.945) 9.998,150.486 9.997,150.49 9.967,150.588 9.948,150.705 7.558,165.031 7.475,165.5 7.344,166.313 7.319,166.466 cw(c8.852,166.72) 7.298,166.731 7.302,167.254 cw(c8.856,167.241) 7.328,167.522 7.421,168.035 cw(c8.95,167.754) 7.492,168.292 7.673,168.782 cw(c9.131,168.242) 7.788,169.025 8.05,169.474 cw(c9.393,168.692) 8.206,169.696 8.542,170.093 cw(c9.729,169.091) 8.732,170.283 9.131,170.616 cw(c10.129,169.425) 9.352,170.771 9.804,171.031 cw(c10.58,169.685) 10.051,171.146 10.292,171.234 11.933,171.833 cw(c12.469,170.375) 11.975,171.848 12.378,171.984 ccw(c12.315,172.173) 12.515,172.173 12.515,173.775 C53I.1@12.482,173.975 R42I.1@12.482,175.15 ; v1(11.6,144.85) 11.159,140.895 ccw(c12.133,140.786) 11.152,140.786 11.152,139.18 11.153,139.068 ccw(c12.007,139.07) 11.156,138.998 11.158,138.974 ccw(c11.809,139.028) 11.165,138.917 12.015,133.986 17.834,99.447 17.837,99.414 17.837,85.737 v1(17.825,85.725) ; v1(14.6,76.275) 14.63,76.305 19.758,76.305 19.943,76.12 v1(25.1,76.12) ; v1(27.24,78.311) 28.675,79.746 28.675,80.725 v1(27.725,81.675)
  Bottom Layer w0.2: v1(11.342,148.196) v1(11.6,144.85) ; v1(14.6,76.275) 14.032,76.275 13.915,76.392 13.915,77.062 14.427,78.471 ccw(c13.274,78.891) 14.434,78.49 14.644,79.097 ccw(c13.485,79.498) 14.662,79.154 15.023,80.387 ccw(c13.846,80.732) 15.036,80.433 15.875,83.775 v1(17.825,85.725) ; v1(25.1,76.12) 27.24,78.26 v1(27.24,78.311) ; v1(27.725,81.675) 27.725,81.703 28.1,82.078 IC17.25@28.1,83.188
ADC2-15: C53J.1 IC17.26 R42J.1 | length 121.7
  Top Layer w0.2: R42J.1@6.191,172.35 C53J.1@6.191,171.175 6.408,170.975 6.986,166.48 ccw(c8.852,166.72) 6.996,166.412 7.018,166.28 7.118,165.658 7.152,165.448 ccw(c7.475,165.5) 7.153,165.444 9.617,150.699 9.645,150.533 ccw(c9.967,150.588) 9.654,150.492 9.685,150.393 ccw(c11.483,150.945) 9.69,150.378 9.709,150.316 ccw(c10.021,150.415) 9.716,150.297 v1(10.655,147.872) ; 10.825,139.18 10.826,139.068 ccw(c12.007,139.07) 10.83,138.97 10.832,138.944 ccw(c11.809,139.028) 10.843,138.861 11.619,134.356 17.281,100.764 17.284,100.73 17.284,99.584 17.19,99.49 v1(17.19,86.271) ; 10.825,139.18 10.825,140.786 cw(c12.133,140.786) 10.825,140.792 v1(10.844,145.048) ; v1(15.325,75.725) 17.553,75.725 v1(19.306,73.973) ; v1(25.812,78.046) 25.812,78.054 27.95,80.192 v1(27.95,80.2)
  Bottom Layer w0.2: v1(10.655,147.872) v1(10.844,145.048) ; 14.624,75.695 13.664,75.695 13.547,75.812 13.547,76.973 13.559,77.042 14.12,78.583 ccw(c13.274,78.891) 14.125,78.596 14.335,79.204 ccw(c13.485,79.498) 14.348,79.245 14.709,80.478 ccw(c13.846,80.732) 14.724,80.535 14.724,80.537 15.005,81.788 ccw(c14.127,81.987) 15.015,81.842 15.32,83.72 17.19,85.59 v1(17.19,86.271) ; 14.624,75.696 v1(15.325,75.725) ; v1(19.306,73.973) 21.147,73.973 21.147,73.956 21.153,73.95 21.148,73.944 21.148,73.456 21.28,73.323 22.944,73.323 23.076,73.456 23.076,73.944 23.071,73.95 23.077,73.956 23.077,74.444 23.071,74.45 23.076,74.456 23.076,74.944 23.071,74.95 23.076,74.956 23.076,75.31 v1(25.812,78.046) ; v1(27.95,80.2) 28.6,80.85 IC17.26@28.6,83.188
Battery: ESP.12 R4.1 R5.2 | length 2.8
  Top Layer w0.2: R5.2@62.925,72.634 R4.1@62.925,73.491 64.809,73.491 ESP.12@64.85,73.45
EN: C26.1 ESP.3 J8.1 R2.1 | length 14.7
  Top Layer w0.2: v1(56.912,81.645) 56.912,81.657 59.307,81.657 61.675,84.025 61.675,84.941 C26.1@61.709,84.975 62.507,84.975 R2.1@62.525,84.957 64.773,84.957 ESP.3@64.85,84.88
  Bottom Layer w0.2: J8.1@56.255,79.23 56.233,79.208 55.367,79.208 55.25,79.325 55.25,81.2 55.695,81.645 v1(56.912,81.645)
GND: "DC IN.1" AC1.6 AC1.7 C1.2 C2.2 C4.2 C5.2 C6.2 C7.2 C8.2 C9.2 C10.2 C11.2 C12.2 C13.2 C14.2 C16.2 C17.2 C18.2 C19.2 C20.2 C21.2 C22.2 C23.2 C24.2 C25.2 C26.2 C27.2 C28.2 C30.2 C31.2 C32.2 C33.2 C34.2 C35.2 C36.2 C37.2 C38.2 C39.2 C40.2 C41.2 C42.2 C43.2 C44.2 C45.2 C46.2 C47.2 C48.2 C49.2 C50.2 C51.2 C52.2 C53A.2 C53AA.2 C53AB.2 C53AC.2 C53AD.2 C53AE.2 C53AF.2 C53B.2 C53C.2 C53D.2 C53E.2 C53F.2 C53G.2 C53H.2 C53I.2 C53J.2 C53K.2 C53L.2 C53M.2 C53N.2 C53O.2 C53P.2 C53Q.2 C53R.2 C53S.2 C53T.2 C53U.2 C53V.2 C53W.2 C53X.2 C53Y.2 C53Z.2 CON2.3 CON5.3 CON6.3 CON7.3 D3.1 D4.1 D5.1 D6.1 ESP.1 ESP.40 ESP.41 ESP.42 ESP.43 ESP.44 ESP.45 ESP.46 ESP.47 ESP.48 ESP.49 Fan.1 IC2.1 IC2.9 IC3.1 IC3.9 IC4.1 IC4.9 IC5.1 IC5.9 IC8.4 IC9.2 IC9.4 IC11.2 IC11.4 IC12.2 IC12.4 IC13.2 IC13.4 IC14.1 IC15.1 IC16.9 IC17.9 IC18.1 IC18.4 IC18.7 IC18.10 IC18.13 IC19A.2 IC19A.4 IC19AA.2 IC19AA.4 IC19AB.2 IC19AB.4 IC19AC.2 IC19AC.4 IC19AD.2 IC19AD.4 IC19AE.2 IC19AE.4 IC19AF.2 IC19AF.4 IC19B.2 IC19B.4 IC19C.2 IC19C.4 IC19D.2 IC19D.4 IC19E.2 IC19E.4 IC19F.2 IC19F.4 IC19G.2 IC19G.4 IC19H.2 IC19H.4 IC19I.2 IC19I.4 IC19J.2 IC19J.4 IC19K.2 IC19K.4 IC19L.2 IC19L.4 IC19M.2 IC19M.4 IC19N.2 IC19N.4 IC19O.2 IC19O.4 IC19P.2 IC19P.4 IC19Q.2 IC19Q.4 IC19R.2 IC19R.4 IC19S.2 IC19S.4 IC19T.2 IC19T.4 IC19U.2 IC19U.4 IC19V.2 IC19V.4 IC19W.2 IC19W.4 IC19X.2 IC19X.4 IC19Y.2 IC19Y.4 IC19Z.2 IC19Z.4 J4.A1 J4.A12 J4.MH1 J4.MH2 J4.MH3 J4.MH4 J8.4 Mot1.6 Mot2.6 MOT3.6 Mot4.6 R3.1 R5.1 R6.1 R11.1 R12.1 R13.1 R17.1 R18.1 R22.2 R23.2 R24.2 R25.2 STM1.3 STM2.3 Y1.2 Y1.4 Y2.2 Y2.4 | length 182.3
  Top Layer w0.4: v1(7.389,145.502) v1(15.675,147.25) ; v1(101.125,86.425) 110.844,140.68 ccw(c110.175,140.8) 110.855,140.805 v1(110.825,145.15) v1(113.925,169.975) v1(110.007,171.878)
  Bottom Layer w0.4: IC19J.2@3.1,171.6 3.4,171.3 v1(7.389,145.502) 7.391,145.487 7.394,145.469 v1(16.339,87.811)
  other v2: 83.575,64.225 74.475,64.575 83.575,64.65 74.475,65.025 83.575,65.05 74.475,65.475 62.375,68.025 62.925,71.466 75.75,74.175 75.75,75.2 73.075,75.575 72.1,75.6 61.8,82.725 59.95,83.775 55.025,84.75 60,87.175 110.85,143.65 110.825,144.4 104.275,144.875 104.25,145.475 15,145.725 104.225,146.1 104.225,146.8 111,147.025 96.325,147.425 111.15,147.8 22.05,147.95 89.75,149.45 28.825,149.875 96.975,150.45 83.55,150.7 35.3,151.275 79.05,151.45 41.05,152.05 71.75,152.2 66.125,152.4 90.875,152.5 59.3,152.525 47.6,152.825 77.775,153.35 52.85,154.1 84.525,154.2 58.925,154.4 68.2,155.45 61.9,155.575 115.425,171.425 4.975,171.825 11.1,174.55 109.4,175.175 17.3,176.675 103.25,177.525 23.55,178.55 96.925,179.475 29.875,180.075 39.925,180.8 90.45,181.175 46.2,181.4 80.5,182.225 74.25,182.9 49.175,182.925 68.025,183.85 55.375,183.975 61.8,184.15
IO0: ESP.27 J8.6 | length 27.6
  Bottom Layer w0.2: J8.6@58.795,80.5 59.938,79.357 59.938,79.177 61.8,77.315 61.98,77.315 64.12,75.175 66.975,75.175 71.24,70.91 v1(82.35,70.91)
M1A: IC16.58 Mot1.5 | length 39.8
  Top Layer w0.2: Mot1.5@82.35,43.487 82.375,43.512 v1(82.375,44.9) ; v1(84,46) 84,59.47 84.785,60.255 87.298,60.255 88.053,59.5 94.575,59.5 95.925,60.85 95.925,66.91 v1(94.795,68.04)
  Bottom Layer w0.2: v1(82.375,44.9) 83.625,44.9 84,45.275 v1(84,46) ; IC16.58@94.375,69.524 94.375,68.541 94.795,68.121 v1(94.795,68.04)
M1B: IC16.59 Mot1.4 | length 38.2
  Top Layer w0.2: Mot1.4@83.35,43.487 83.35,59.283 84.649,60.582 87.434,60.582 87.966,60.05 94.375,60.05 95.45,61.125 95.45,65.889 93.855,67.484 93.855,68.358 v1(93.812,68.401)
  Bottom Layer w0.2: v1(93.812,68.401) 93.844,68.432 93.844,69.493 IC16.59@93.875,69.524
M2A: IC16.60 Mot2.5 | length 82.9
  Top Layer w0.2: Mot2.5@83.8,33.775 83.875,33.7 v1(83.875,30.825) ; v1(93.002,67.982) 93.06,67.925 93.06,67.459 v1(94.031,66.488)
  Bottom Layer w0.2: v1(83.875,30.825) 85.111,30.825 88.936,27 104.775,27 108.827,31.052 108.827,62.408 104.465,66.77 97.083,66.77 96.833,66.52 96.745,66.52 96.713,66.488 v1(94.031,66.488) ; v1(93.002,67.982) 93.06,68.039 93.06,68.5 93.325,68.765 93.325,69.474 IC16.60@93.375,69.524
M2B: IC16.61 Mot2.4 | length 84.1
  Top Layer w0.2: v1(82.625,31.75) 82.625,31.831 82.8,32.006 Mot2.4@82.8,33.775 ; v1(91.975,68) 91.975,66.882 v1(92.547,66.31)
  Bottom Layer w0.2: v1(82.625,31.75) 84.648,31.75 89.038,27.36 104.612,27.36 108.5,31.248 108.5,62.272 104.612,66.16 99.327,66.16 99.075,65.908 93.864,65.908 93.835,65.937 93.729,65.937 ccw(c93.299,65.147) 93.643,65.978 93.607,65.993 93.29,66.31 v1(92.547,66.31) ; v1(91.975,68) 92.032,68.057 92.117,68.057 92.825,68.765 92.825,69.474 IC16.61@92.875,69.524
M3A: IC17.58 MOT3.5 | length 32.4
  Top Layer w0.2: v1(31.85,54.425) 32.31,53.965 32.31,52.515 30.27,50.475 30.27,48.179 32.2,46.249 MOT3.5@32.2,43.137
  Bottom Layer w0.2: IC17.58@27.1,71.712 27.1,68.135 31.85,63.385 v1(31.85,54.425)
M3B: IC17.59 MOT3.4 | length 31.3
  Top Layer w0.2: v1(31.195,50.58) 33.2,48.575 MOT3.4@33.2,43.137
  Bottom Layer w0.2: IC17.59@26.6,71.712 26.6,68.172 30.985,63.787 30.985,52.35 31.195,52.14 v1(31.195,50.58)
M4A: IC17.60 Mot4.5 | length 51.1
  Top Layer w0.2: v1(33.317,41.753) 33.323,41.747 33.323,41.382 36.325,38.38 Mot4.5@36.325,32.438
  Bottom Layer w0.2: IC17.60@26.1,71.712 26.1,69.95 25.825,69.675 22.7,69.675 21.575,68.55 21.575,62.823 24.038,60.36 27.502,60.36 30.381,57.482 30.381,44.689 v1(33.317,41.753)
M4B: IC17.61 Mot4.4 | length 52
  Top Layer w0.2: v1(32.575,41.675) 32.575,41.667 35.325,38.917 Mot4.4@35.325,32.438
  Bottom Layer w0.2: IC17.61@25.6,71.712 25.55,71.662 25.55,70.8 25.025,70.275 22.35,70.275 20.6,68.525 20.6,61.675 22.242,60.033 27.367,60.033 29.884,57.516 29.884,44.366 v1(32.575,41.675)